# Altium PCB pcb1.PcbDoc
Units mm, origin at the board's own origin, x right, y up, seen from the top; angles counter-clockwise.
Board outline 30.2 x 24 mm, 4 copper layers (Top Layer, GND, 3V3, Bottom Layer), stack 0.603 mm thick; 43 components, 34 nets, 160 pads, 25 vias.
Unrouted connection lines stored in the file: 53.
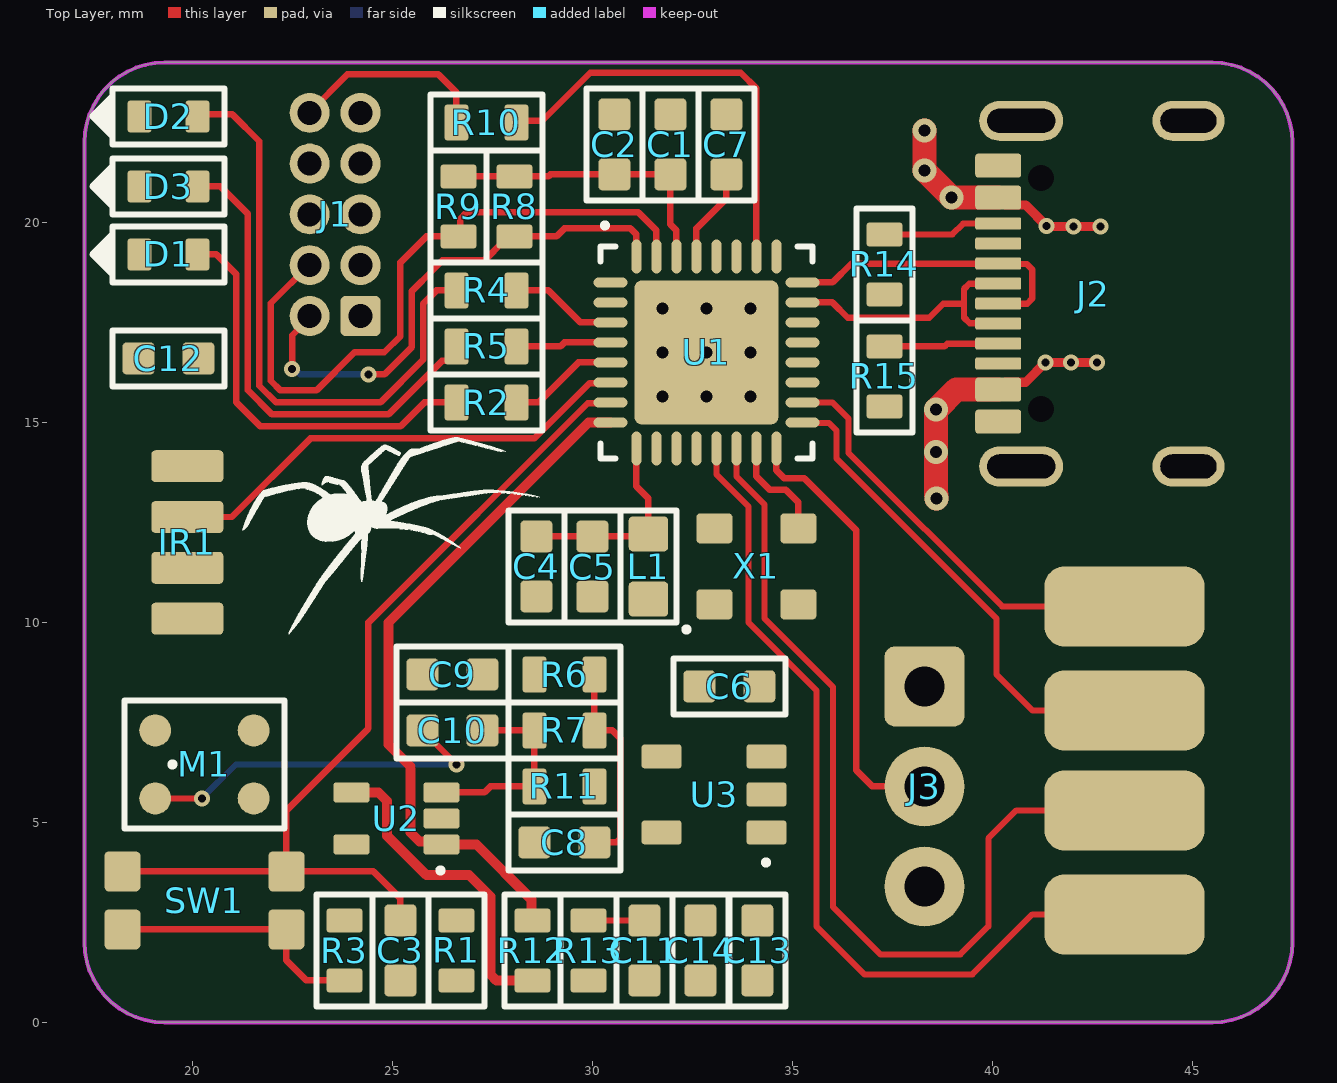
[diagram p0: Top Layer view]
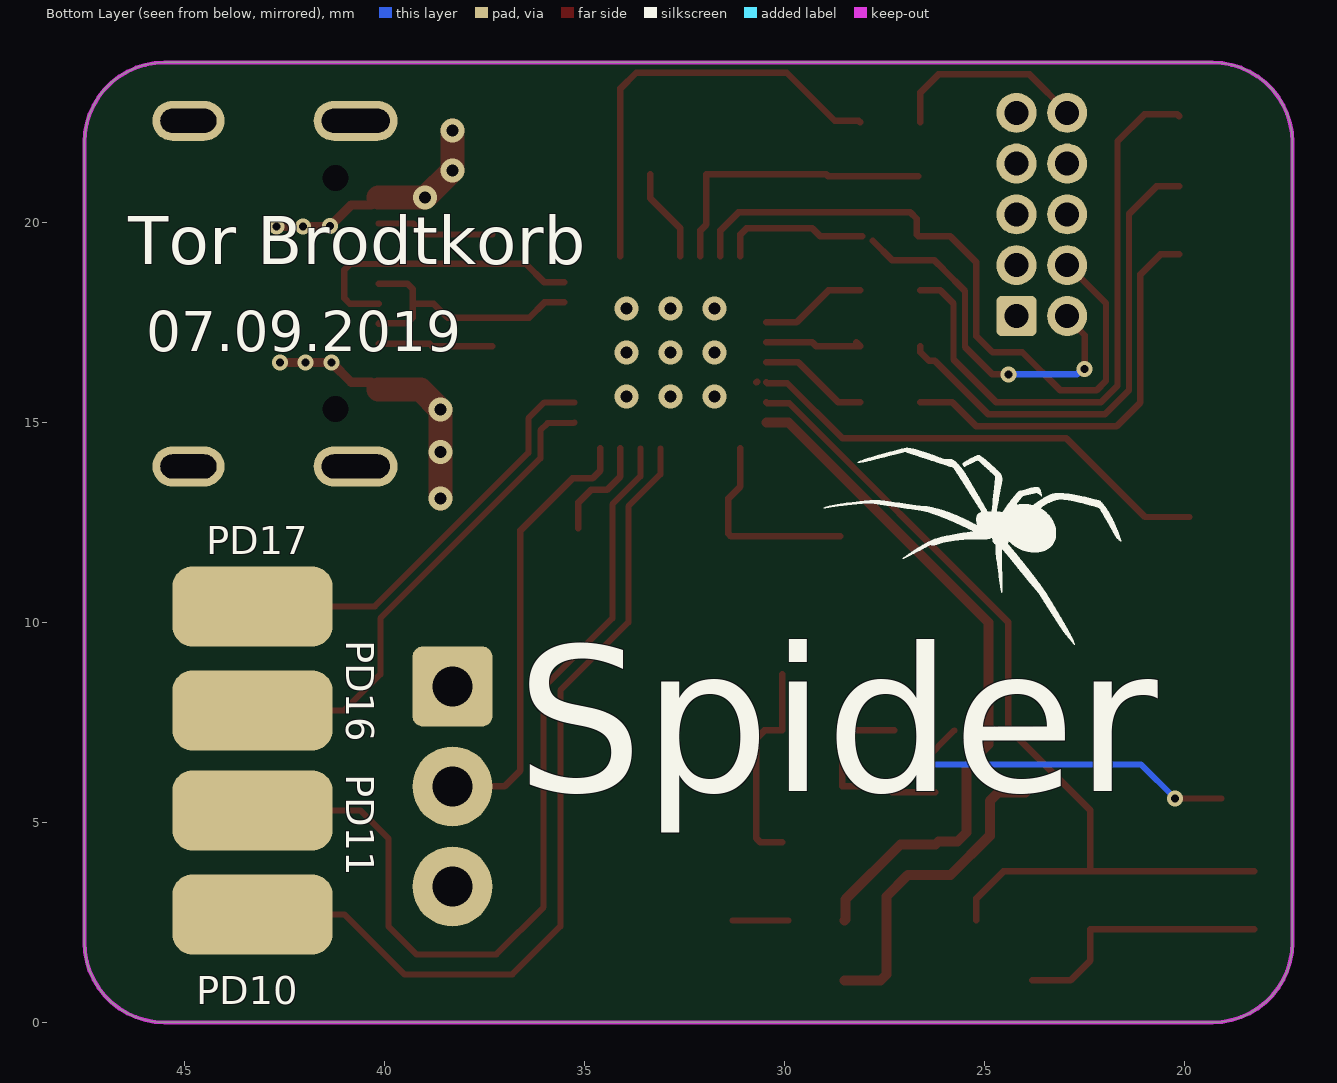
[diagram p1: Bottom Layer view, seen from below]
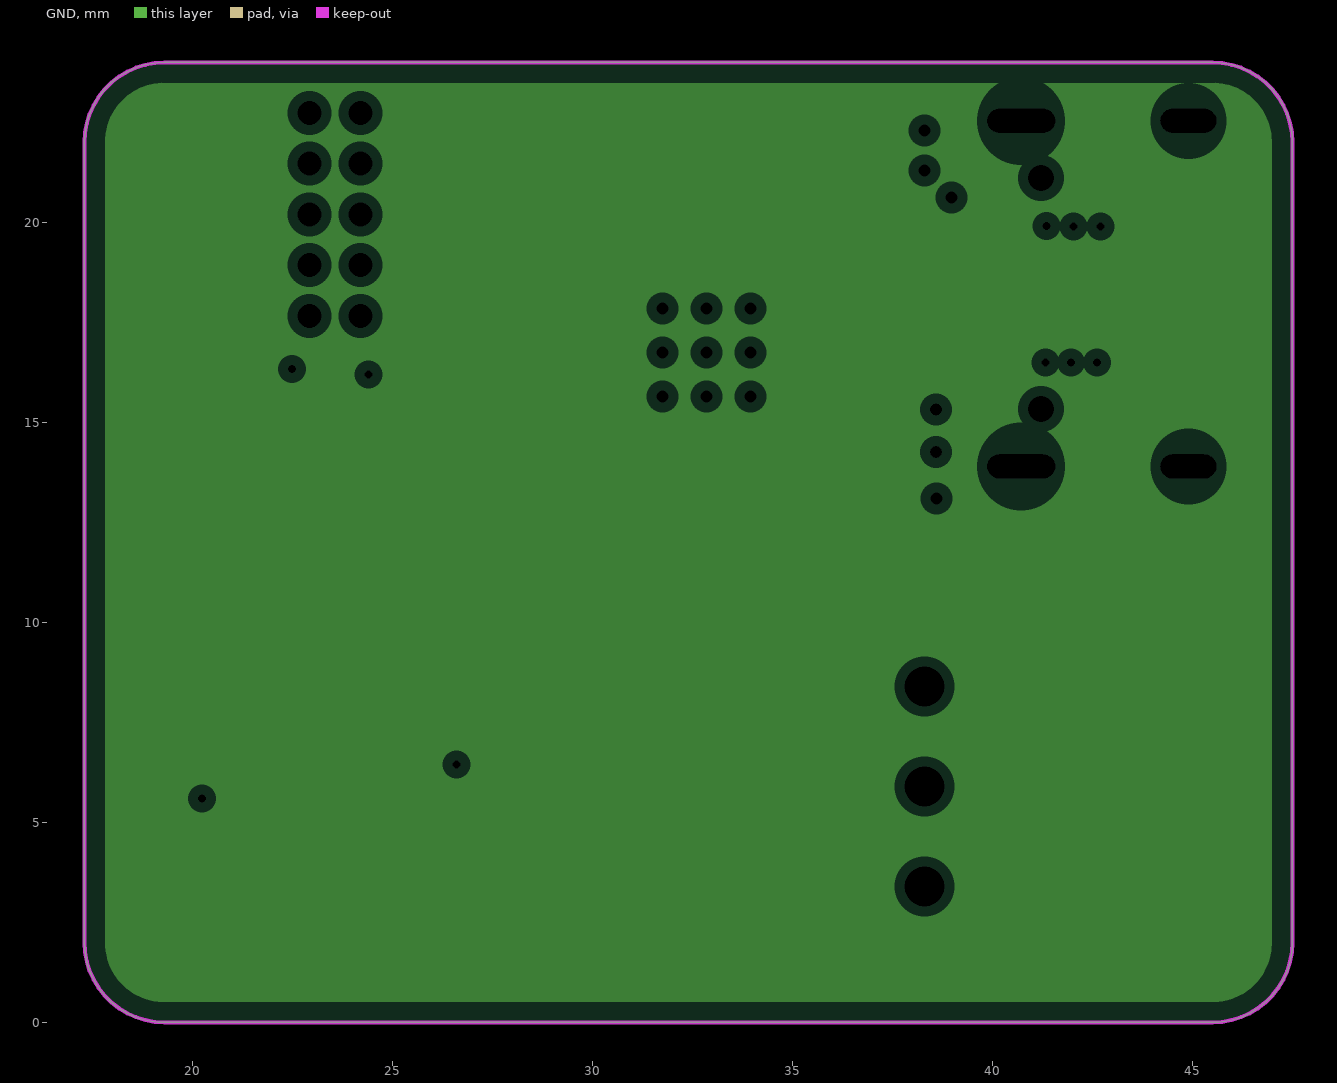
[diagram p2: GND, clearances drawn from the general rule]
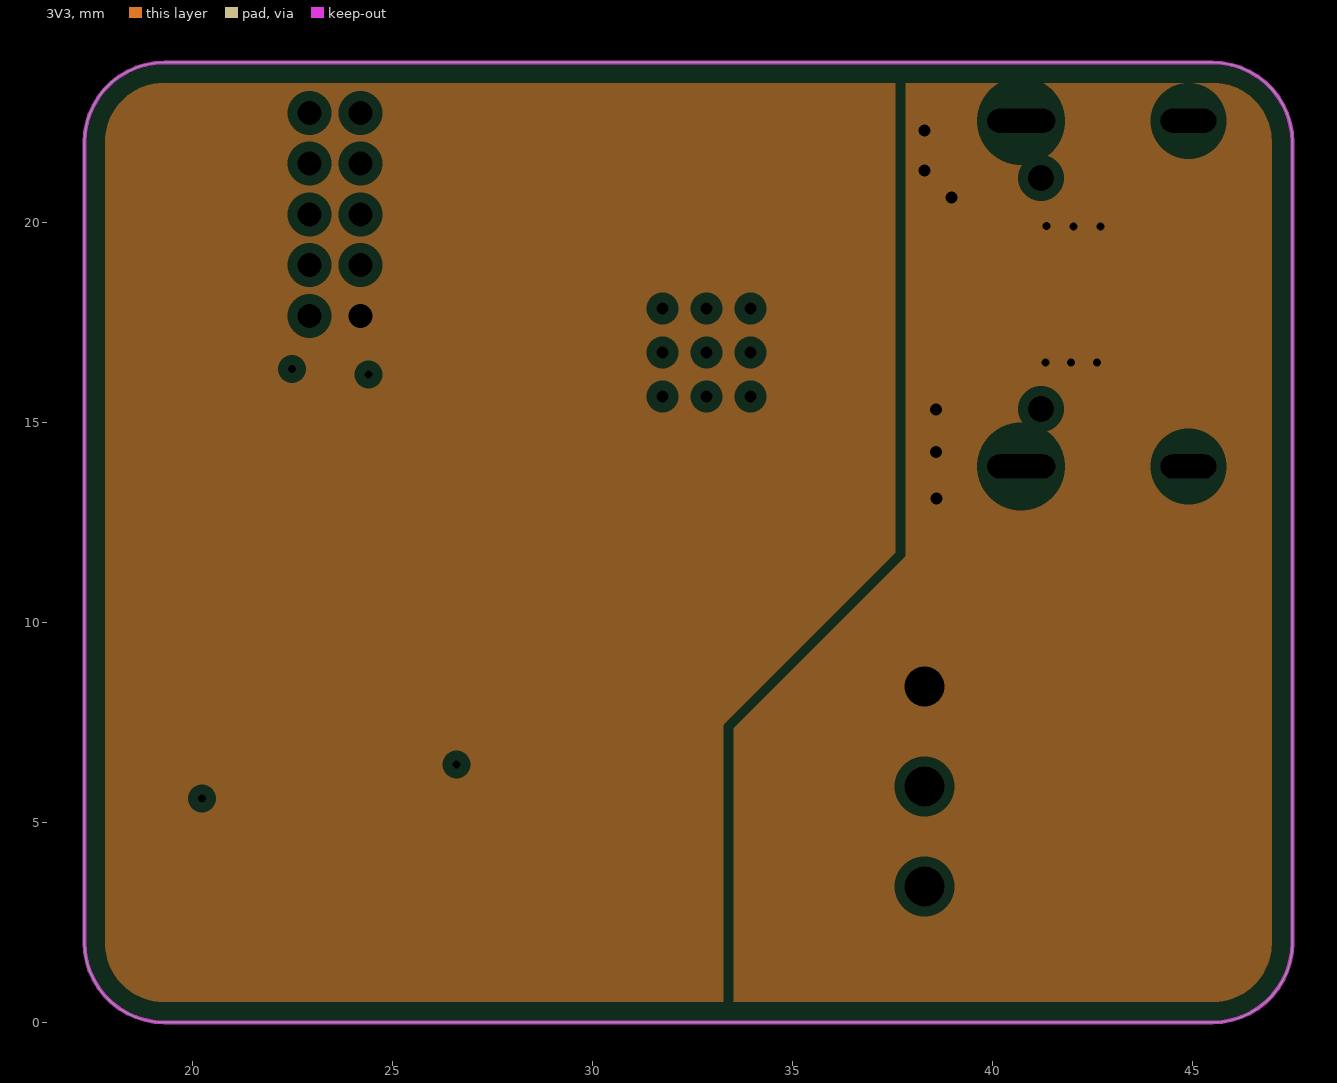
[diagram p3: 3V3, clearances drawn from the general rule]
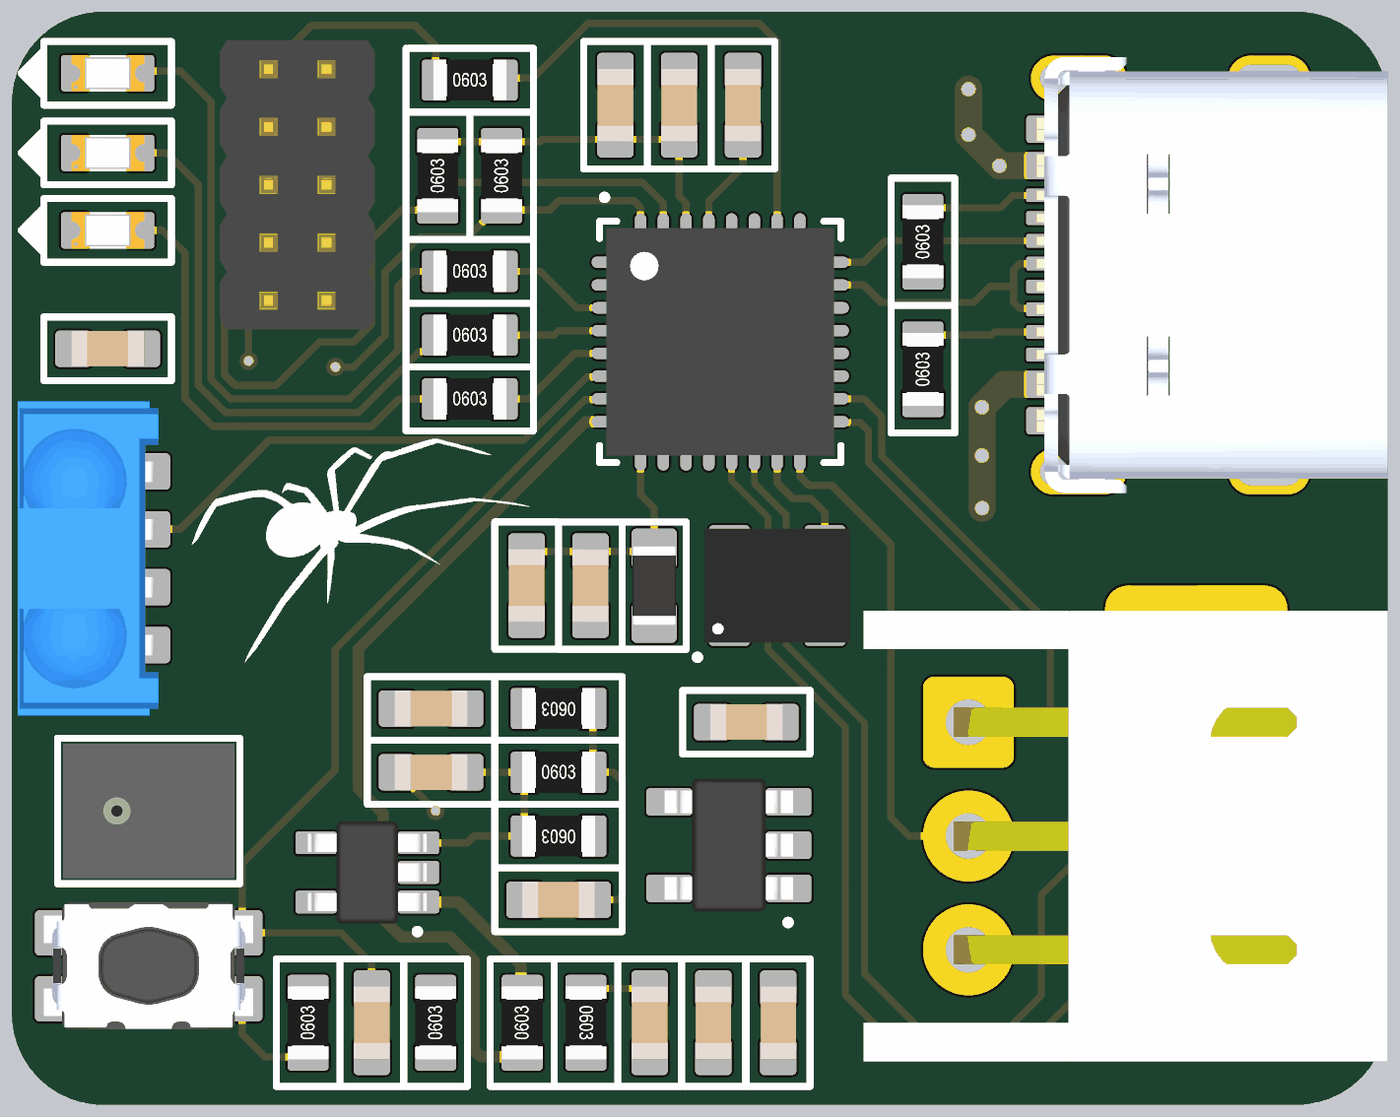
[diagram p4: 3D render of the assembled board from above, using the file's embedded part models]

## Layer stack, top to bottom
Top Solder: solder mask 0.0102, Solder Resist, Dk 3.5
Top Layer: signal copper 0.0356
Dielectric 2: prepreg 0.0711, PP-006, Dk 4.1
GND: plane copper 0.035
Dielectric 1: dielectric 0.32, FR-4, Dk 4.8
3V3: plane copper 0.035, net (Multiple Nets)
Dielectric 3: prepreg 0.0711, PP-006, Dk 4.1
Bottom Layer: signal copper 0.0356
Bottom Solder: solder mask 0.0102, Solder Resist, Dk 3.5

## Board outline
17.3,2 ccw(c19.3,2) 19.3,0 45.5,0 ccw(c45.5,2) 47.5,2 47.5,22 ccw(c45.5,22) 45.5,24 19.3,24 ccw(c19.3,22) 17.3,22

## Design rules (kind name [scope] priority, off if disabled: settings)
Clearance [All] p1: gap=0.254 ignorepadtopadclearanceinfootprint=TRUE except(0: Arc-Hole Track-Hole SMDPad-Hole THPad-Hole Via-Hole Fill-Hole Poly-Hole Region-Hole Text-Hole; 0.127: Arc-Arc Arc-Track Track-Track SMDPad-SMDPad; 0.2: Arc-SMDPad Track-SMDPad; 0.33: Arc-THPad Track-THPad)
DiffPairsRouting [All] p1: maxlimit=0.5 minlimit=0.16 mostfreqgap=0.3 toplayer_minwidth=0.16 toplayer_maxwidth=5 toplayer_prefwidth=0.3 bottomlayer_minwidth=0.16 bottomlayer_maxwidth=5 bottomlayer_prefwidth=0.3 maxuncoupledlength=12.7
PlaneClearance [All] p1: clearance=0.25
PlaneConnect [All] p1: planeconnectstyle=Direct reliefexpansion=0.25 reliefentries=4 reliefconductorwidth=0.16 reliefairgap=0.2
PolygonConnect [All] p1: connectstyle=Relief reliefconductorwidth=0.254 reliefentries=4 polygonreliefangle="90 Angle" airgapwidth=0.254
RoutingVias [All] p1: holewidth=0.3 width=0.6 viastyle="Through Hole" minholewidth=0.2 minwidth=0.4 maxholewidth=6.3 maxwidth=10
SolderMaskExpansion [All] p1: expansion=0.05 istentingtop=FALSE
Width [All] p1: maxlimit=10 minlimit=0.127 preferedwidth=0.16
27 further rules are at their usual default settings.

## Classes and differential pairs
differential pair USB: +USB_P -USB_N

## Components (designator, comment, footprint, x,y, rotation, side; value= is the part's Value field where it differs from the comment)
C1 "passive_5" "capacitor 0603" 31.95,21.95 r270 top value=10uF
C2 "passive_5" "capacitor 0603" 30.55,21.95 r270 top value=100nF
C3 "passive_5" "capacitor 0603" 25.2,1.8 r90 top value=1uF
C4 "passive_5" "capacitor 0603" 28.6,11.4 r90 top value=10uF
C5 "passive_5" "capacitor 0603" 30,11.399 r90 top value=100nF
C6 "passive_5" "capacitor 0603" 33.423,8.4 r180 top value=100nF
C7 "passive_5" "capacitor 0603" 33.35,21.95 r270 top value=1uF
C8 "passive_5" "capacitor 0603" 29.3,4.5 r0 top value=1uF
C9 "passive_5" "capacitor 0603" 26.5,8.7 r0 top value=1uF
C10 "passive_5" "capacitor 0603" 26.5,7.3 r180 top value=10uF
C11 "passive_5" "capacitor 0603" 31.3,1.8 r90 top value=1uF
C12 "passive_5" "capacitor 0603" 19.4,16.6 r180 top value=1uF
C13 "passive_5" "capacitor 0603" 34.123,1.8 r90 top value=100nF
C14 "passive_5" "capacitor 0603" 32.7,1.8 r90 top value=1uF
D1 "LED White" "LED 0603 white" 19.4,19.2 r180 top
D2 "LED White" "LED 0603 white" 19.4,22.65 r180 top
D3 "LED White" "LED 0603 white" 19.4,20.9 r180 top
IR1 "sensor_1" TSSP77038TR 19.873,12 r90 top
J1 "Header 1.27mm" "header male 2x5, pitch 1.27mm" 23.565,20.202 r180 top
J2 "USB 2.0" USB4105-GF-A 42.523,18.22 r90 top
J3 "connector_41" "S3B-XH-A (LF)(SN)" 38.3,5.9 r270 top
L1 "passive_9" "inductor 0603" 31.4,11.399 r90 top value=10uH
M1 "sensor_2" SPU0410HR5H-PB 20.3,6.45 r90 top
R1 "passive_2" "resistor 0603" 26.6,1.8 r90 top value=10kΩ
R2 "passive_2" "resistor 0603" 27.35,15.5 r0 top value=10kΩ
R3 "passive_2" "resistor 0603" 23.8,1.8 r90 top value=10kΩ
R4 "passive_2" "resistor 0603" 27.35,18.3 r0 top value=10kΩ
R5 "passive_2" "resistor 0603" 27.35,16.9 r0 top value=10kΩ
R6 "passive_2" "resistor 0603" 29.3,8.7 r180 top value=10kΩ
R7 "passive_2" "resistor 0603" 29.3,7.3 r0 top value=10kΩ
R8 "passive_2" "resistor 0603" 28.05,20.4 r90 top value=10kΩ
R9 "passive_2" "resistor 0603" 26.65,20.4 r90 top value=10kΩ
R10 "passive_2" "resistor 0603" 27.35,22.5 r0 top value=39Ω
R11 "passive_2" "resistor 0603" 29.3,5.9 r180 top value=10kΩ
R12 "passive_2" "resistor 0603" 28.5,1.8 r90 top value=39Ω
R13 "passive_2" "resistor 0603" 29.9,1.8 r270 top value=10kΩ
R14 "passive_2" "resistor 0603" 37.3,18.95 r90 top value=5.1kΩ
R15 "passive_2" "resistor 0603" 37.3,16.15 r90 top value=5.1kΩ
SW1 "connector_35" "KMR621NG LFS" 20.3,3.05 r0 top
U1 "SAMD21" ATSAMD21E17D-MUT 32.85,16.75 r0 top
U2 "ic_6" MCP6241T-E/OT 25.1,5.1 r180 top
U3 "regulator_1" TCR2EF33,LM(CT 33.04,5.7 r180 top
X1 "8 MHz" DSC6001CE2A-008.0000 34.1,11.4 r90 top

## Footprints (in the part's own frame and the unit in brackets; to place one, negate y for a bottom-side part, rotate by r counter-clockwise, add the part's x,y. Pads: shape width x height; smd on the part's side, far side on the other; paste and mask are expansions set on the pad)
ATSAMD21E17D-MUT [mm] "QFN, 32-Leads, Body 5.00x5.00mm, Pitch 0.50mm, Thermal Pad 3.60x3.60mm, IPC Medium Density"
  oval 0.85x0.25 smd: 1(-2.4,1.75) 2(-2.4,1.25) 3(-2.4,0.75) 4(-2.4,0.25) 5(-2.4,-0.25) 6(-2.4,-0.75) 7(-2.4,-1.25) 8(-2.4,-1.75) 17(2.4,-1.75) 18(2.4,-1.25) 19(2.4,-0.75) 20(2.4,-0.25) 21(2.4,0.25) 22(2.4,0.75) 23(2.4,1.25) 24(2.4,1.75)
  oval 0.25x0.85 smd: 9(-1.75,-2.4) 10(-1.25,-2.4) 11(-0.75,-2.4) 12(-0.25,-2.4) 13(0.25,-2.4) 14(0.75,-2.4) 15(1.25,-2.4) 16(1.75,-2.4) 25(1.75,2.4) 26(1.25,2.4) 27(0.75,2.4) 28(0.25,2.4) 29(-0.25,2.4) 30(-0.75,2.4) 31(-1.25,2.4) 32(-1.75,2.4)
  rrect10% 3.6x3.6 smd: 33(0,0)
  silkscreen extent -2.65,-2.65 2.65,3.22, body extent -2.5,-2.5 2.5,2.5, height 1
"capacitor 0603" [mm]
  rrect25% 0.8x0.8 smd: 1(-0.75,0) 2(0.75,0)
  silkscreen extent -1.4,-0.7 1.4,0.7, body extent -0.8,-0.4 0.8,0.4, height 0.8
DSC6001CE2A-008.0000 [mm]
  rrect25% 0.75x0.9 smd: 1(-0.95,1.05) 2(-0.95,-1.05) 3(0.95,-1.05) 4(0.95,1.05)
  silkscreen extent -1.62,1.7 -1.53,1.8, body extent -1.25,-1.6 1.25,1.6, height 0.85
"header male 2x5, pitch 1.27mm" [mm]
  rrect25% 1x1 hole 0.6: 1(-0.635,2.54)
  round 1 hole 0.6: 2(0.635,2.54) 3(-0.635,1.27) 4(0.635,1.27) 5(-0.635,0) 6(0.635,0) 7(-0.635,-1.27) 8(0.635,-1.27) 9(-0.635,-2.54) 10(0.635,-2.54)
  body extent -1.7,-3.17 1.7,3.17, height 5.35
"inductor 0603" [mm]
  rrect25% 0.88x0.99 smd: 1(-0.815,0) 2(0.815,0)
  silkscreen extent -1.4,-0.7 1.4,0.7, body extent -0.87,-0.48 0.87,0.48, height 0.91
"KMR621NG LFS" [mm]
  rrect25% 0.9x1 smd: 1(-2.05,0.725) 1(2.05,0.725) 2(-2.05,-0.725) 2(2.05,-0.725)
  body extent -2.3,-1.4 2.3,1.4, height 1.9
"LED 0603 white" [mm]
  rrect25% 0.6x0.8 smd: 1(-0.725,0) 2(0.725,0)
  silkscreen extent -1.4,-0.7 1.9,0.7, body extent -0.8,-0.4 0.8,0.4, height 0.6
MCP6241T-E/OT [mm] "SOT23, 5-Leads, Body 2.03x2.10mm, Pitch 0.65mm, IPC Medium Density"
  rrect25% 0.9x0.5 smd: 1(-1.125,0.65) 2(-1.125,0) 3(-1.125,-0.65) 4(1.125,-0.65) 5(1.125,0.65)
  silkscreen extent -1.15,1.25 -1.05,1.35, body extent -1.3,-1.12 1.3,1.12, height 1.1
"resistor 0603" [mm]
  rrect25% 0.6x0.9 smd: 1(-0.75,0) 2(0.75,0)
  silkscreen extent -1.4,-0.7 1.4,0.7, body extent -0.8,-0.45 0.8,0.45, height 0.5
"S3B-XH-A (LF)(SN)" [mm]
  rrect25% 2x2 hole 1: 1(-2.5,0)
  round 2 hole 1: 2(0,0) 3(2.5,0)
  body extent -4.95,-2.3 4.95,9.2, height 6.1
SPU0410HR5H-PB [mm]
  round 0.8 smd: 1(0.85,1.23) 2(0.85,-1.23) 3(-0.85,-1.23) 4(-0.85,1.23)
  silkscreen extent -1.6,-2 1.6,2, body extent -1.47,-1.88 1.48,1.88, height 1.1
TCR2EF33,LM(CT [mm] "SOT23, 5-Leads, Body 2.90x2.80mm, Pitch 0.95mm, IPC Medium Density"
  rrect25% 1x0.6 smd: 1(-1.31,0.95) 2(-1.31,0) 3(-1.31,-0.95) 4(1.31,-0.95) 5(1.31,0.95)
  silkscreen extent -1.35,1.65 -1.25,1.75, body extent -1.41,-1.46 1.41,1.46, height 1.12
TSSP77038TR [mm]
  rrect25% 0.8x1.8 smd: 1(-1.905,0) 2(-0.635,0) 3(0.635,0) 4(1.905,0)
  body extent -3.46,-0.65 3.44,2.45, height 3.21
USB4105-GF-A [mm]
  rrect25% 0.6x1.15 smd: A1_B12(-3.2,2.378) A4_B9(-2.4,2.378) B1_A12(3.2,2.378) B4_A9(2.4,2.378)
  rrect25% 0.3x1.15 smd: A5(-1.25,2.378) A6(-0.25,2.378) A7(0.25,2.378) A8(1.25,2.378) B5(1.75,2.378) B6(0.75,2.378) B7(-0.75,2.378) B8(-1.75,2.378)
  oval 1x1.8 hole 0.6 slot 1.4 at 90 deg: SHELL(-4.32,-2.377) SHELL(4.32,-2.377)
  oval 1x2.1 hole 0.6 slot 1.7 at 90 deg: SHELL(-4.32,1.803) SHELL(4.32,1.803)
  round 0 hole 0.65: ""(-2.89,1.303) ""(2.89,1.303)
  body extent -4.79,-4.98 4.79,2.73, height 3.31

## Part data
C1 C2 C3 C4 C5 C6 C7 C8 C9 C10 C11 C12 C13 C14: "Capacitor 0603"
D1 D2 D3: library part diode_6, "LED 0603 white"
IR1: "IR receiver, 38 kHz, 40m, SMD", Manufacturer 1="Vishay Semiconductor Opto Division", Manufacturer Part Number 1=TSSP77038TR, Supplier Part Number 1=TSSP77038TRCT-ND, Supplier 1=Digi-Key
J1: library part connector_17, "Header male 2x5, pitch 1.27mm"
J2: library part connector_35, "USB-C (2.0)", Manufacturer 1=GCT, Manufacturer Part Number 1=USB4105-GF-A, Supplier Part Number 1=2073-USB4105-GF-ACT-ND, Link=https://www.digikey.no/product-detail/no/gct/USB4105-GF-A/2073-USB4105-GF-ACT-ND/11198510, Supplier 1=Digi-Key
J3: "JST connector 1x3, pitch 2.5mm, right angle, TH", Manufacturer 1="JST (JAPAN SOLDERLESS TERMINALS)", Manufacturer Part Number 1="S3B-XH-A (LF)(SN)", Supplier Part Number 1=1516290, Link=https://no.farnell.com/jst-japan-solderless-terminals/s3b-xh-a-lf-sn/header-right-angle-3way/dp/1516290?st=jst, Supplier 1=Farnell
L1: "Inductor 0603"
M1: "Microphone, MEMS, 100 Hz - 10 kHz, 3.3V,  SMD", Manufacturer 1=Knowles, Manufacturer Part Number 1=SPU0410HR5H-PB, Supplier Part Number 1=423-1138-1-ND, Supplier 1=Digi-Key
R1 R2 R3 R4 R5 R6 R7 R8 R9 R10 R11 R12 R13 R14 R15: "Resistor 0603"
SW1: "Tactile switch SMD, tiny", Manufacturer 1=C&K, Manufacturer Part Number 1="KMR621NG LFS", Supplier Part Number 1=CKN10684CT-ND, Link=https://www.digikey.no/product-detail/en/c-k/KMR621NG-LFS/CKN10684CT-ND/6035356, Supplier 1=Digi-Key
U1: library part cpu_0, "SAMD21, 48 MHz, 128KB flash, 16KB RAM, 32 pins, USB device, QFN", Manufacturer 1="Microchip Technology", Manufacturer Part Number 1=ATSAMD21E17D-MUT, Supplier Part Number 1=ATSAMD21E17D-MUTTR-ND, Link=https://www.digikey.no/products/no?keywords=ATSAMD21E17D-MUTTR-ND, Supplier 1=Digi-Key
U2: "OpAmp, 1 circuit, rail-to-rail, single supply, 1.8V to 5V, SOT23-5", Manufacturer 1="Microchip Technology", Manufacturer Part Number 1=MCP6241T-E/OT, Supplier Part Number 1=MCP6241T-E/OTCT-ND, Supplier 1=Digi-Key
U3: "LDO fixed, 3.3V output, 0.2V dropout, 200mA", Current=200mA, Manufacturer 1="Toshiba Semiconductor and Storage", Manufacturer Part Number 1=TCR2EF33,LM(CT, Output voltage=3.3V, Supplier Part Number 1=TCR2EF33LM(CTCT-ND, Dropout=0.2V, Link=https://www.digikey.no/product-detail/en/toshiba-semiconductor-and-storage/TCR2EF33-LM-CT/TCR2EF33LM-CTCT-ND/4503328, Supplier 1=Digi-Key
X1: library part oscillator_2, "Oscillator, 8MHz, 3.3V, 3.2mm x 2.5mm", Manufacturer 1="Microchip Technology", Manufacturer Part Number 1=DSC6001CE2A-008.0000, Supplier Part Number 1=DSC6001CE2A-008.0000-ND, Link=https://www.digikey.com/en/products/detail/microchip-technology/DSC6001CE2A-008-0000/7732669, Supplier 1=Digi-Key

## Free pads (board coordinates)
  rrect50% 4x2 all layers, no hole: 21(43.3,2.7) 21(43.3,5.3) 21(43.3,7.8) 21(43.3,10.4)

## Via types
v1: diameter 0.4, hole 0.2, Top Layer to Bottom Layer, tented both sides, 10 vias
v2: diameter 0.6, hole 0.3, Top Layer to Bottom Layer, 9 vias
v3: diameter 0.6, hole 0.3, Top Layer to Bottom Layer, tented both sides, 6 vias

## Nets (pads, with @x,y where several pads share a name; then routed paths per layer and width w, separated by ;. In a path a pad name is that pad's centre, name@x,y a point inside that pad or via, vN(x,y) a via of type N, cw(c..) or ccw(c..) an arc to the next point about the centre after c; other vN are vias at no path point)
3V3: C1.2 C2.2 C6.2 C9.2 C12.2 C14.2 IR1.2 J1.1 L1.1 M1.1 R1.1 R6.2 R8.2 R9.2 U1.30 U2.5 U3.5 X1.1 X1.4 | length 7.4
  Top Layer w0.16: R9.2 R8.2 28.9,21.15 28.95,21.2 C1.2 31.95,19.95 32.1,19.8 U1.30
5V: C13.2 J2.A4_B9 J2.B4_A9 J3.1 U3.1 U3.3 | length 12.7
  Top Layer w0.23: J2.A4_B9 40.33,16.005 40.829,16.005 v1(41.324,16.5) v1(42.612,16.5) ; J2.B4_A9 40.33,20.435 40.74,20.435 40.829,20.435 41.364,19.9 v1(42.7,19.9)
  Top Layer w0.6: v3(38.3,22.3) v3(38.3,21.3) v3(38.98,20.62) J2.B4_A9 ; v3(38.6,13.1) 38.6,13.18 38.595,13.185 v3(38.595,14.255) v3(38.595,15.318) 39.097,15.82 J2.A4_B9
  other v1: 41.968,16.5 41.357,19.907 42.032,19.9
BUTTON: C3.2 R1.2 SW1.1 U1.7 | length 23.2
  Top Layer w0.16: SW1.1@18.25,3.775 SW1.1@22.35,3.775 ; C3.2 25.2,3.1 24.525,3.775 SW1.1@22.35,3.775 ; U1.7 30.433,15.483 29.883,15.483 24.4,10 24.4,7.35 22.35,5.3 SW1.1@22.35,3.775
GND: C1.1 C2.1 C3.1 C4.1 C5.1 C6.1 C7.1 C8.1 C9.1 C11.1 C12.1 C13.1 C14.1 D1.2 D2.2 D3.2 IR1.1 IR1.4 J1.3 J1.5 J2.A1_B12 J2.B1_A12 J3.3 M1.2 M1.3 R3.2 R11.1 R14.1 R15.1 U1.10 U1.28 U1.33 U2.2 U3.2 X1.2
  other v2: 31.75,15.65 32.85,15.65 33.95,15.65 31.75,16.75 32.85,16.75 33.95,16.75 31.75,17.85 32.85,17.85 33.95,17.85
IR: IR1.3 U1.6 | length 12
  Top Layer w0.16: IR1.3 20.985,12.635 22.95,14.6 28.544,14.6 29.927,15.983 30.433,15.983 U1.6 ; U1.6@30.683,16.017 U1.6@30.7,16
LED1: R2.2 U1.5 | length 2.8
  Top Layer w0.16: R2.2 28.65,15.5 29.65,16.5 U1.5
LED2: R4.2 U1.3 | length 2.7
  Top Layer w0.16: R4.2 28.9,18.3 29.7,17.5 U1.3
LED3: R5.2 U1.4 | length 2.5
  Top Layer w0.16: R5.2@28.2,17 R5.2 29.2,16.9 29.3,17 U1.4
Ledstrip: J3.2 U1.16 | length 11
  Top Layer w0.16: U1.16 34.6,13.8 34.8,13.6 35.3,13.6 36.6,12.3 36.6,6.3 37,5.9 J3.2
NetC4_2: C4.2 C5.2 L1.2 U1.9 | length 5.1
  Top Layer w0.16: C4.2 31.337,12.15 L1.2 31.4,13.1 31.1,13.4 U1.9
NetC8_2: C8.2 R6.1 R7.2 | length 5.3
  Top Layer w0.16: C8.2 30.6,4.5 30.7,4.6 30.7,7.1 30.5,7.3 R7.2 R6.1
NetC10_1: C10.1 R7.1 R11.2 U2.3 | length 5.1
  Top Layer w0.16: U2.3 27.3,5.75 27.45,5.9 R11.2 R7.1 C10.1
NetC10_2: C10.2 M1.4 | length 9.1
  Top Layer w0.15: M1.4 v1(20.236,5.6) ; C10.2 26.596,6.454 v1(26.6,6.454)
  Bottom Layer w0.15: v1(20.236,5.6) 21.09,6.454 v1(26.6,6.454)
NetC11_2: C11.2 R13.1 | length 1.4
  Top Layer w0.15: R13.1 C11.2
NetD1_1: D1.1 R2.1 | length 10.4
  Top Layer w0.16: D1.1 20.6,19.2 21.1,18.7 21.1,15.5 21.7,14.9 25.2,14.9 25.8,15.5 R2.1
NetD2_1: D2.1 R4.1 | length 15
  Top Layer w0.16: D2.1 20.175,22.7 21,22.7 21.674,22.026 21.674,15.92 22.094,15.5 24.7,15.5 25.774,16.574 25.774,17.974 26.1,18.3 R4.1
NetD3_1: D3.1 R5.1 | length 12.2
  Top Layer w0.16: D3.1 20.7,20.9 21.387,20.213 21.387,15.801 21.988,15.2 24.9,15.2 26.237,16.537 26.38,16.537 26.6,16.757 R5.1
NetJ1_2: J1.2 R8.1 U1.32 | length 12.8
  Top Layer w0.16: v1(22.495,16.334) 22.495,17.183 22.93,17.618 J1.2 ; v1(24.4,16.2) 24.8,16.2 25.487,16.887 25.487,18.287 26.02,18.82 26.02,18.822 26.248,19.05 27.3,19.05 R8.1@27.79,19.54 ; R8.1 29.1,19.65 29.3,19.85 30.95,19.85 31.1,19.7 U1.32
  Bottom Layer w0.16: v1(22.495,16.334) 22.56,16.334 22.694,16.2 v1(24.4,16.2)
NetJ1_4: J1.4 R9.1 U1.31 | length 17
  Top Layer w0.16: J1.4 22.913,18.932 21.961,17.979 21.961,16.039 22.2,15.8 23.1,15.8 24.052,16.752 24.797,16.752 25.2,17.155 25.2,19 25.85,19.65 R9.1 ; R9.1@26.696,19.696 26.696,20.096 26.85,20.25 31.15,20.25 31.6,19.8 U1.31
NetJ1_10: J1.10 R10.1 | length 5
  Top Layer w0.16: J1.10 22.93,22.758 23.872,23.7 26.15,23.7 26.6,23.25 R10.1 ; J1.10@22.93,22.842 J1.10@22.93,22.858
NetJ2_A5: J2.A5 R15.2 | length 2.9
  Top Layer w0.16: R15.2 38.8,16.9 38.87,16.97 J2.A5
NetJ2_B5: J2.B5 R14.2 | length 3
  Top Layer w0.15: R14.2 39,19.7 39.27,19.97 J2.B5
NetR3_1: R3.1 SW1.2 | length 6.5
  Top Layer w0.16: SW1.2@18.25,2.325 22.35,2.325 22.35,1.55 22.85,1.05 R3.1
NetR10_2: R10.2 U1.26 | length 10.9
  Top Layer w0.16: R10.2 28.146,22.546 28.746,22.546 29.943,23.743 33.707,23.743 34.1,23.35 U1.26
NetR12_1: R12.1 R13.2 U2.4 | length 8.1
  Top Layer w0.25: U2.4 23.979,5.746 24.654,5.746 24.865,5.535 24.865,4.665 25.848,3.683 26.917,3.683 27.45,3.15 27.45,1.196 27.596,1.05 R12.1
NetU1_15: U1.15 X1.3 | length 2.7
  Top Layer w0.16: U1.15 34.1,13.65 34.437,13.313 34.837,13.313 35.15,13 X1.3
PA10: pad.21@43.3,2.7 U1.13 | length 21.8
  Top Layer w0.15: U1.13 33.1,13.7 33.9,12.9 33.9,10 35.6,8.3 35.6,2.4 36.8,1.2 39.5,1.2 41,2.7 pad.21@43.3,2.7
PA11: pad.21@43.3,5.3 U1.14 | length 23
  Top Layer w0.15: U1.14 33.6,13.651 34.3,12.951 34.3,10.1 36.018,8.382 36.018,2.882 37.2,1.7 39.2,1.7 39.9,2.4 39.9,4.6 40.6,5.3 pad.21@43.3,5.3
PA16: pad.21@43.3,7.8 U1.17 | length 12.3
  Top Layer w0.15: U1.17 35.269,14.981 35.919,14.981 36.1,14.8 36.1,14.1 40.1,10.1 40.1,8.7 41,7.8 pad.21@43.3,7.8
PA17: pad.21@43.3,10.4 U1.18 | length 10.7
  Top Layer w0.15: U1.18 36,15.5 36.4,15.1 36.4,14.242 40.242,10.4 pad.21@43.3,10.4
SOUND: R12.2 U1.8 U2.1 | length 17.4
  Top Layer w0.25: R12.2 28.471,2.579 28.471,3.079 27.1,4.45 U2.1 26.15,4.525 25.677,4.525 25.45,4.752 25.45,6.399 24.9,6.949 24.9,10 29.9,15 U1.8
USB_N: J2.A7 J2.B7 U1.23 | length 6.6
  Top Layer w0.16: U1.23@35.5,18 36,18 36.38,17.62 38.422,17.62 38.772,17.97 39.29,17.97 ; J2.B7 40.135,17.48 39.432,17.48 39.29,17.622 39.29,17.97 ; J2.A7 39.424,18.469 39.29,18.336 39.29,17.97
USB_P: J2.A6 J2.B6 U1.24 | length 7.4
  Top Layer w0.16: U1.24@35.5,18.5 36,18.5 36.47,18.97 J2.B6 ; J2.A6@40.146,17.971 40.866,17.971 41,18.104 41,18.818 40.858,18.96 J2.B6@40.155,18.96
VDDCORE: C7.2 U1.29 | length 2.4
  Top Layer w0.16: U1.29 32.6,19.85 33.35,20.6 C7.2
pads on no net: J1.6 J1.7 J1.8 J1.9 J2. J2.A8 J2.B8 J2.SHELL U1.1 U1.2 U1.11 U1.12 U1.19 U1.20 U1.21 U1.22 U1.25 U1.27 U3.4

## Polygon pours and split planes (outlines as drawn)
no net on GND (split plane): 19.3,23.49 45.5,23.49 45.515,23.491 45.667,23.482 45.832,23.454 45.993,23.408 46.147,23.344 46.294,23.263 46.43,23.166 46.555,23.055 46.666,22.93 46.763,22.794 46.844,22.647 46.908,22.493 46.954,22.332 46.982,22.167 46.991,22.015 46.99,22 46.99,2 46.991,1.985 46.982,1.833 46.954,1.668 46.908,1.507 46.844,1.353 46.763,1.206 46.666,1.07 46.555,0.945 46.43,0.834 46.294,0.737 46.147,0.656 45.993,0.592 45.832,0.546 45.667,0.518 45.515,0.509 45.5,0.51 19.3,0.51 19.285,0.509 19.133,0.518 18.968,0.546 18.807,0.592 18.653,0.656 18.506,0.737 18.37,0.834 18.245,0.945 18.134,1.07 18.037,1.206 17.956,1.353 17.892,1.507 17.846,1.668 17.818,1.833 17.809,1.985 17.81,2 17.81,22 17.809,22.015 17.818,22.167 17.846,22.332 17.892,22.493 17.956,22.647 18.037,22.794 18.134,22.93 18.245,23.055 18.37,23.166 18.506,23.263 18.653,23.344 18.807,23.408 18.968,23.454 19.133,23.482 19.285,23.491
5V on 3V3 (split plane): 45.667,23.482 45.832,23.454 45.993,23.408 46.147,23.344 46.294,23.263 46.43,23.166 46.555,23.055 46.666,22.93 46.763,22.794 46.844,22.647 46.908,22.493 46.954,22.332 46.982,22.167 46.991,22.015 46.99,22 46.99,2 46.991,1.985 46.982,1.833 46.954,1.668 46.908,1.507 46.844,1.353 46.763,1.206 46.666,1.07 46.555,0.945 46.43,0.834 46.294,0.737 46.147,0.656 45.993,0.592 45.832,0.546 45.667,0.518 45.515,0.509 45.5,0.51 33.529,0.51 33.529,7.346 37.792,11.608 37.82,11.65 37.829,11.7 37.829,23.49 45.5,23.49 45.515,23.491
3V3 on 3V3 (split plane): 19.3,23.49 37.571,23.49 37.571,11.754 33.308,7.492 33.28,7.45 33.271,7.4 33.271,0.51 19.3,0.51 19.285,0.509 19.133,0.518 18.968,0.546 18.807,0.592 18.653,0.656 18.506,0.737 18.37,0.834 18.245,0.945 18.134,1.07 18.037,1.206 17.956,1.353 17.892,1.507 17.846,1.668 17.818,1.833 17.809,1.985 17.81,2 17.81,22 17.809,22.015 17.818,22.167 17.846,22.332 17.892,22.493 17.956,22.647 18.037,22.794 18.134,22.93 18.245,23.055 18.37,23.166 18.506,23.263 18.653,23.344 18.807,23.408 18.968,23.454 19.133,23.482 19.285,23.491

## Keep-outs
Keep-Out Layer:
  the board outline again, w0.1

## Other copper
3V3 (plane layer: these items are gaps in the copper):
  lines w0.254: 33.4,0 33.4,7.4 37.7,11.7 37.7,24

## Silkscreen, mask and mechanical layers (free items; w line width, h text height)
Top Overlay:
  region: 5254 vertices and 0 holes, not listed, extent 21.242,9.704 28.679,14.631
Bottom Overlay:
  region: 5254 vertices and 0 holes, not listed, extent 21.579,9.438 29.015,14.365
  text "Tor Brodtkorb" at 46.4,18.95 h1.2
  text "07.09.2019" at 45.949,16.785 h1
  text "PD17" at 44.45,11.7 h0.7
  text "PD16" at 40.95,9.55 h0.7 r90
  text "PD11" at 40.95,6.2 h0.7 r90
  text "Spider" at 36.7,3.49 h12
  text "PD10" at 44.7,0.45 h0.7